# EAGLE board GESTURED CONTROLLED MOTOR (EAGLE 7.6.0)

Size 73.58 x 88.79 mm. Coordinates in mm from the lower left corner, seen from the top.
Outline: 0,0 56.82,0 56.82,53.33 0,53.33 0,0
Copper layers (1*16): Top 0.035mm / dielectric 1.5mm / Bottom 0.035mm
Design rules "default": minimum track width 10mil, minimum drill 24mil, track to track 8mil, track to pad 8mil, pad to pad 8mil, via to via 8mil, smd to smd 8mil, copper to edge 40mil, drill to drill 8mil, minimum pad ring 10mil, minimum via ring 8mil, stop-mask expansion 4mil, vias tented up to drill 0mil, thermal gap 10mil

## Footprints (pad centres in the part's own frame; a part is rotated, then mirrored left to right if it is on the bottom)
DC-POWER = drill 0.889 pad 2.54 octagon: + 0,2.54; - 0,-2.54
2P-2.54-65/35MIL = drill 0.889 pad 1.651 square: 1 0,1.27 | drill 0.889 pad 1.651: 2 0,-1.27
0207/10 = drill 0.813 octagon: 1 -5.08,0; 2 5.08,0
B25V = drill 0.813 long: A 2.54,0.635; E -2.54,0.635; S 0,0.635
ARDUINO_UNO = drill 1.016 pad 1.88: 0 63.5,50.8; 1 60.96,50.8; 2 58.42,50.8; 3 55.88,50.8; 3.3V 35.56,2.54; 4 53.34,50.8; 5 50.8,50.8; 5V 38.1,2.54; 6 48.26,50.8; 7 45.72,50.8; 8 41.656,50.8; 9 39.116,50.8; 10 36.576,50.8; 11 34.036,50.8; 12 31.496,50.8; 13 28.956,50.8; A0 50.8,2.54; A1 53.34,2.54; A2 55.88,2.54; A3 58.42,2.54; A4 60.96,2.54; A5 63.5,2.54; AREF 23.876,50.8; GND 26.416,50.8; GND. 43.18,2.54; GND.. 40.64,2.54; I/OREF 30.48,2.54; N/C 27.94,2.54; RESET 33.02,2.54; SCL 18.796,50.8; SDA 21.336,50.8; VIN 45.72,2.54 | hole 3.2: 66.04,7.62; 66.04,35.56; 15.24,50.8; 13.97,2.54
1X16P-2.54-2.54-11.6-3.0-BLACK-MALE = drill 0.889 pad 1.651 square: 1 0,19.05 | drill 0.889 pad 1.651: 2 0,16.51; 3 0,13.97; 4 0,11.43; 5 0,8.89; 6 0,6.35; 7 0,3.81; 8 0,1.27; 9 0,-1.27; 10 0,-3.81; 11 0,-6.35; 12 0,-8.89; 13 0,-11.43; 14 0,-13.97; 15 0,-16.51; 16 0,-19.05
DIL08 = drill 0.813 pad 1.27: 1 -3.81,-3.81; 2 -1.27,-3.81; 3 1.27,-3.81; 4 3.81,-3.81; 5 3.81,3.81; 6 1.27,3.81; 7 -1.27,3.81; 8 -3.81,3.81

## Placement (x,y rotation side)
BAT1  [DC-POWER]  5,10.08 0 top
BAT2  [DC-POWER]  5,22.78 0 top
M1  [2P-2.54-65/35MIL]  5,340.28 0 top  (outside the outline)
R6  220‎Ω  [0207/10]  5,73.58 0 top
R7  100‎Ω  [0207/10]  5,86.28 0 top
R8  100‎Ω  [0207/10]  5,98.98 0 top  (outside the outline)
R9  100‎Ω  [0207/10]  5,111.68 0 top  (outside the outline)
R10  100‎Ω  [0207/10]  5,124.38 0 top  (outside the outline)
R11  100‎Ω  [0207/10]  5,137.08 0 top  (outside the outline)
R12  1k‎Ω  [0207/10]  5,200.58 0 top  (outside the outline)
R13  1k‎Ω  [0207/10]  5,213.28 0 top  (outside the outline)
R14  1k‎Ω  [0207/10]  5,162.48 0 top  (outside the outline)
R15  1k‎Ω  [0207/10]  5,175.18 0 top  (outside the outline)
R16  1k‎Ω  [0207/10]  5,238.68 0 top  (outside the outline)
R17  1k‎Ω  [0207/10]  5,251.38 0 top  (outside the outline)
R18  1k‎Ω  [0207/10]  5,276.78 0 top  (outside the outline)
R19  1k‎Ω  [0207/10]  5,289.48 0 top  (outside the outline)
R20  1k‎Ω  [0207/10]  5,314.88 0 top  (outside the outline)
R21  1k‎Ω  [0207/10]  5,327.58 0 top  (outside the outline)
Rpot1  250k‎Ω  [B25V]  5,60.88 0 top
U1  [ARDUINO_UNO]  5,35.48 0 top
U2  [1X16P-2.54-2.54-11.6-3.0-BLACK-MALE]  5,48.18 0 top
U3  [DIL08]  5,187.88 0 top  (outside the outline)
U4  [DIL08]  5,149.78 0 top  (outside the outline)
U5  [DIL08]  5,225.98 0 top  (outside the outline)
U6  [DIL08]  5,264.08 0 top  (outside the outline)
U7  [DIL08]  5,302.18 0 top  (outside the outline)

## Library data of the parts
BAT1 BAT2 M1 R6-R21 Rpot1 U1-U7 = AUTODESK_CIRCUITS_BREADBOARD

## Nets
N$1: U1.12 U2.4
N$2: U1.11 U2.6
N$3: U1.5 U2.11
N$4: U1.4 U2.12
N$5: U1.3 U2.13
N$6: U1.2 U2.14
N$7: Rpot1.S U2.3
N$8: R6.2 U2.15
N$9: R6.1 Rpot1.A U1.5V U2.2
N$10: R7.2 U4.3
N$11: R8.2 U3.3
N$12: R9.2 U5.3
N$13: R11.2 U7.3
N$14: R10.2 U6.3
N$15: R14.1 R15.2 U4.2
N$16: BAT1.+ U3.7 U4.7 U5.7 U6.7 U7.7
N$17: BAT1.- BAT2.+ R7.1 R8.1 R9.1 R10.1 R11.1 R12.1 R15.1 R16.1 R18.1 R20.1 Rpot1.E U1.GND.. U2.1 U2.5 U2.16
N$18: BAT2.- U3.4 U4.4 U5.4 U6.4 U7.4
N$19: U4.5
N$20: U4.1
N$21: U4.8
N$22: R14.2 U1.A0 U4.6
N$24: R13.2 U1.A1 U3.6
N$25: U3.5
N$26: U3.1
N$27: U3.8
N$28: R12.2 R13.1 U3.2
N$29: R17.2 U1.A2 U5.6
N$30: U5.5
N$31: U5.1
N$32: U5.8
N$33: R16.2 R17.1 U5.2
N$34: R19.2 U1.A3 U6.6
N$35: U6.5
N$36: U6.1
N$37: U6.8
N$38: R18.2 R19.1 U6.2
N$39: R21.2 U1.A4 U7.6
N$40: U7.5
N$41: U7.1
N$42: U7.8
N$43: R20.2 R21.1 U7.2
N$44: M1.2 U1.6
N$45: M1.1 U1.9

## Tracks (layer width: path | path; a pad name or v marks a point on that pad's centre or on a via)
N$1  (1 unrouted)
N$2  (1 unrouted)
N$3  (1 unrouted)
N$4  (1 unrouted)
N$5  (1 unrouted)
N$6  (1 unrouted)
N$7  (1 unrouted)
N$8  (1 unrouted)
N$9  (3 unrouted)
N$10  (1 unrouted)
N$11  (1 unrouted)
N$12  (1 unrouted)
N$13  (1 unrouted)
N$14  (1 unrouted)
N$15  (2 unrouted)
N$16  (5 unrouted)
N$17  (16 unrouted)
N$18  (5 unrouted)
N$22  (2 unrouted)
N$24  (2 unrouted)
N$28  (2 unrouted)
N$29  (2 unrouted)
N$33  (2 unrouted)
N$34  (2 unrouted)
N$38  (2 unrouted)
N$39  (2 unrouted)
N$43  (2 unrouted)
N$44  (1 unrouted)
N$45  (1 unrouted)